# Altium PCB alim.PcbDoc
Units mil, origin at the board's own origin, x right, y up, seen from the top; angles counter-clockwise.
Board outline 4020 x 2755 mil, 2 copper layers (Top Layer, Bottom Layer); 38 components, 28 nets, 124 pads, 38 vias.
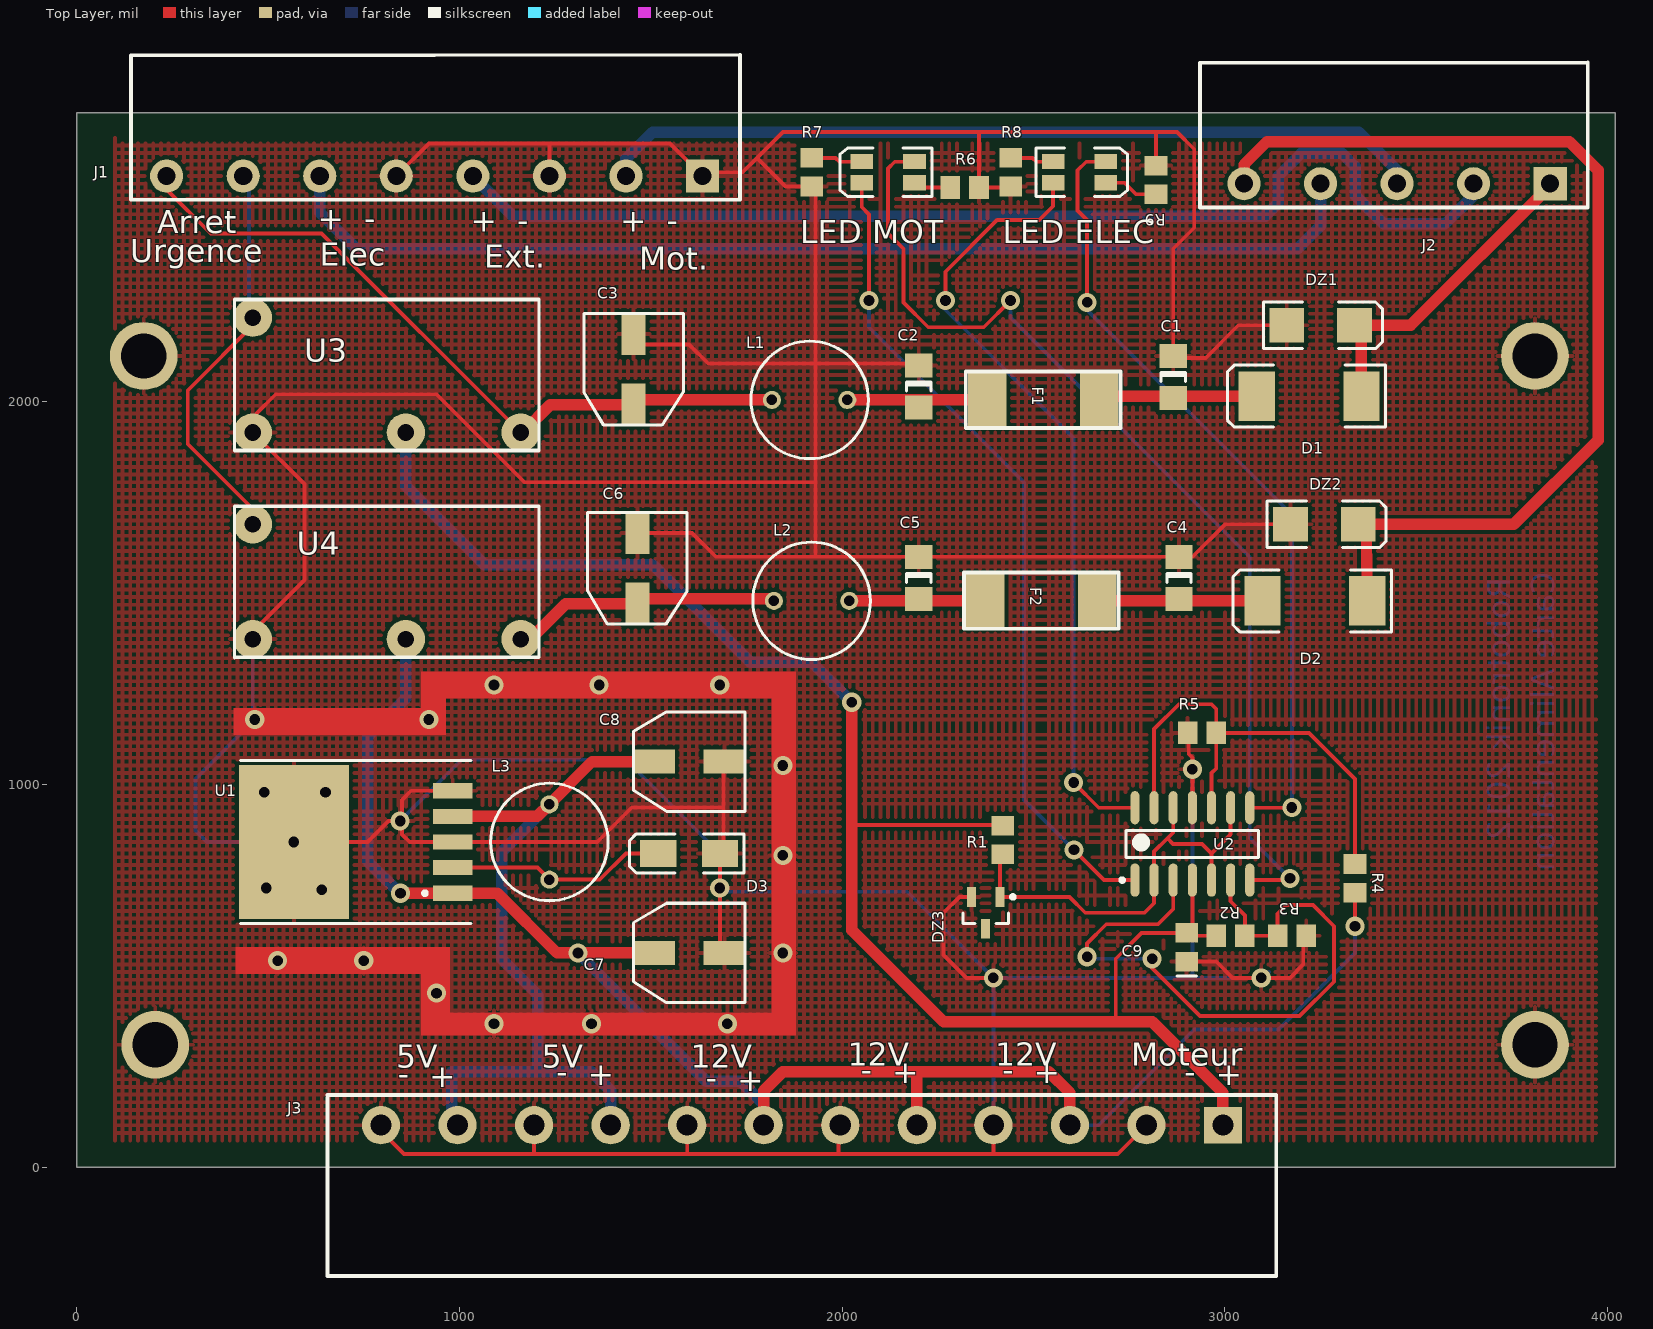
[diagram p0: Top Layer view]
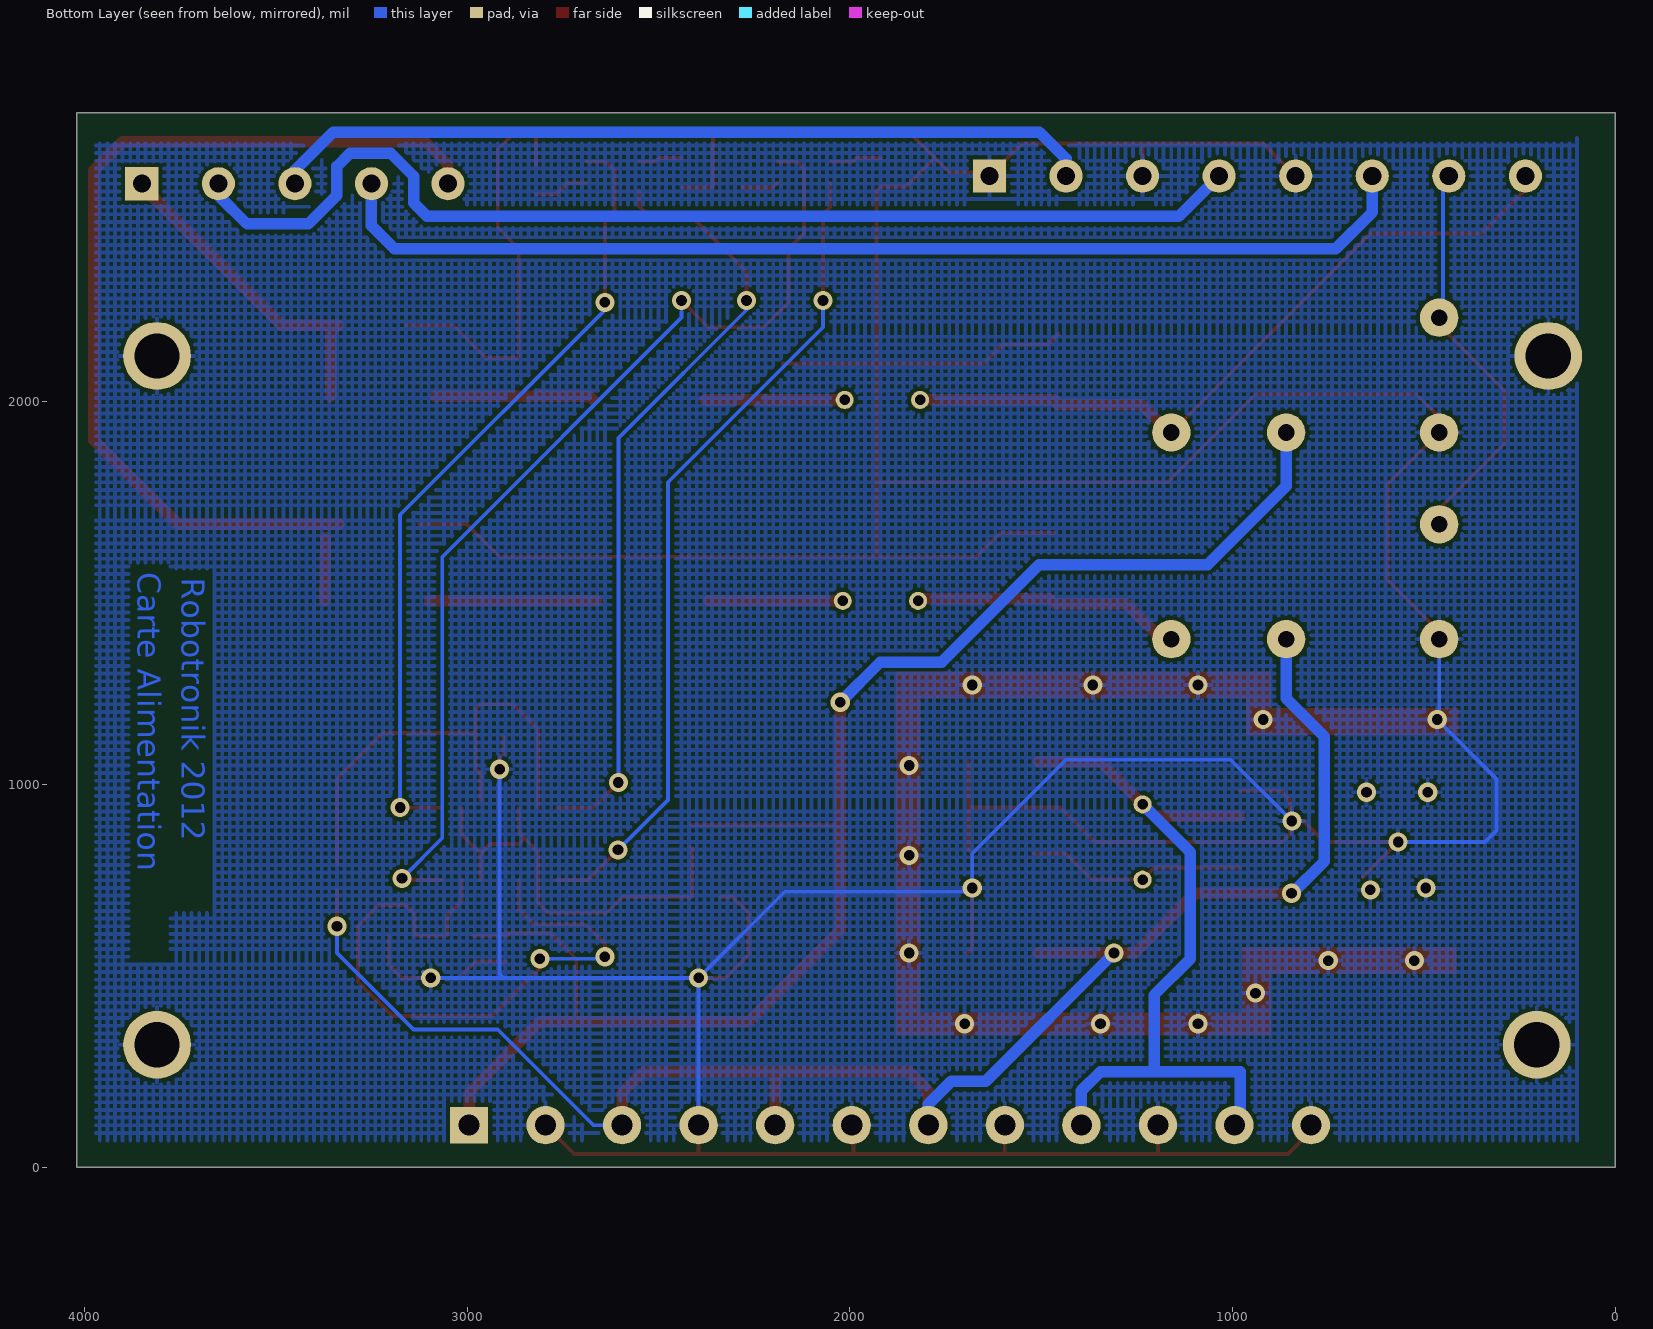
[diagram p1: Bottom Layer view, seen from below]

## Layer stack, top to bottom
Top Layer: signal copper 1.4
Dielectric: core 12.6, FR-4, Dk 4.8
Bottom Layer: signal copper 1.4

## Board outline
0,2755 4020,2755 4020,0 0,0

## Design rules (kind name [scope] priority, off if disabled: settings)
Clearance [All] p1: gap=10
PolygonConnect [All] p1: connectstyle=Relief reliefconductorwidth=10 reliefentries=4 polygonreliefangle="90 Angle"
RoutingVias [All] p1: holewidth=28 width=50 viastyle="Through Hole" minholewidth=28 minwidth=50 maxholewidth=28 maxwidth=50
SilkscreenOverComponentPads [All] p1: minsilkscreentomaskgap=10
SolderMaskExpansion [All] p1: expansion=4
Width [All] p1: maxlimit=30 minlimit=10 preferedwidth=10
27 further rules are at their usual default settings.

## Components (designator, comment, footprint, x,y, rotation, side; value= is the part's Value field where it differs from the comment)
C1 "C1206" 1206 2865,2065 r270 top
C2 "C1206" 1206 2200,2040 r270 top
C3 "220µF/50V" Cap-D6 1455,2085 r270 top
C4 "C1206" 1206 2880,1540 r270 top
C5 "C1206" 1206 2200,1540 r270 top
C6 "220µF/50V" Cap-D6 1465,1565 r270 top
C7 "100µF/50V" Cap-D6 1600,560 r180 top
C8 "330µF/50V" Cap-D6 1600,1060 r180 top
C9 "C0805" 0805 2900,575 r90 top
D1 "Diode" DSO-C2/X3.3 3220,2015 r180 top (schematic designator D4)
D2 "Diode" DSO-C2/X3.3 3235,1480 r180 top (schematic designator D4)
D3 "10MQ040" DSO-C2/X1.8 1600,820 r180 top (schematic designator D5)
DZ1 "SMCJ40CA" DSO-C2/X2.3 3250,2200 r0 top
DZ2 "SMCJ40CA" DSO-C2/X2.3 3260,1680 r0 top (schematic designator DZ1)
DZ3 "Zener 5V" MF03A_N 2375,665 r270 top
F1 "Fuse" "FUSE MF-SM050" 2525,2005 r180 top
F2 "Fuse" "FUSE MF-SM050" 2520,1480 r180 top (schematic designator F1)
J1 "Header 8" EMBMCS8 1635,2590 r180 top
J2 "header1x5" H1x5 2995,3090 r270 top
J3 "Header 12" MCS12 1895,110 r180 top
L1 "100µH" SELF1 1915,2005 r180 top
L2 "100µH" SELF1 1920,1480 r180 top
L3 "330µH" SELF1 1235,850 r90 top
"LED ELEC" "HSMF-C656" 3.2X2.7X1.1A 2620,2600 r0 top (schematic designator LED9)
"LED MOT" "HSMF-C656" 3.2X2.7X1.1A 2120,2600 r180 top (schematic designator LED9)
R1 "ERA6Y" ERA-0805 2420,855 r270 top
R2 "ERA6Y" ERA-0805 3015,605 r0 top
R3 "ERA6Y" ERA-0805 3175,605 r0 top
R4 "ERA6Y" ERA-0805 3340,755 r90 top
R5 "ERA6Y" ERA-0805 2940,1135 r180 top
R6 "ERA6Y" ERA-0805 2320,2560 r0 top
R7 "ERA6Y" ERA-0805 1920,2600 r270 top
R8 "ERA6Y" ERA-0805 2440,2600 r270 top
R9 "ERA6Y" ERA-0805 2820,2580 r90 top
U1 "LM2575D2T-5" 936A-02 775,850 r90 top
U2 "LM2902D" D014_N 2915,845 r90 top
U3 "relay4" "Relay 4" 460,2220 r270 top
U4 "relay4" "Relay 4" 460,1680 r270 top

## Footprints (in the part's own frame and the unit in brackets; to place one, negate y for a bottom-side part, rotate by r counter-clockwise, add the part's x,y. Pads: shape width x height; smd on the part's side, far side on the other; paste and mask are expansions set on the pad)
3.2X2.7X1.1A [mm] "SM LED, Bi-Colour; 4 Flat Leads; Body 3.2 x 2.7 x 1.1 mm (LxWxH)"
  rect 1.5x1 smd: 1(-1.75,0.7) 2(-1.75,-0.7) 3(1.75,0.7) 4(1.75,-0.7)
  silkscreen extent -2.9,-1.6 3.2,1.6
0805 [mm] "Chip Capacitor; Body 2.0 x 1.2 mm (LxW typ)"
  rect 1.3x1.5 smd: 1(-0.95,0) 2(0.95,0)
  silkscreen extent -1.9,-0.65 -1.9,0.65
936A-02 [mm] "D2-PAK; 5 Leads; Body 14.7 (inc. leads) x 10.2 mm (LxW max)"
  rect 1x2.6 smd: 1(-3.4,-5.275) 2(-1.7,-5.275) 3(0,-5.275) 4(1.7,-5.275) 5(3.4,-5.275)
  rect 10.2x7.3 smd: 6(0,5.275)
  silkscreen extent -5.4,-6.48 5.4,8.82
1206 [mm] "Chip Capacitor; Body 3.2 x 1.6 mm (LxW typ)"
  rect 1.6x1.8 smd: 1(-1.4,0) 2(1.4,0)
  silkscreen extent -0.3,-0.8 0.3,0.8
Cap-D6 [mm]
  rect 2.8x1.6 smd: 1(2.35,0) 2(-2.35,0)
  silkscreen extent -3.7,-3.3 3.7,3.3
D014_N [mm] "SOIC, 14-Leads, Body 8.7x3.9mm, Pitch 1.27mm, IPC Medium Density"
  oval 2.2x0.6 smd: 1(-2.4,3.81) 2(-2.4,2.54) 3(-2.4,1.27) 4(-2.4,0) 5(-2.4,-1.27) 6(-2.4,-2.54) 7(-2.4,-3.81) 8(2.4,-3.81) 9(2.4,-2.54) 10(2.4,-1.27) 11(2.4,0) 12(2.4,1.27) 13(2.4,2.54) 14(2.4,3.81)
  silkscreen extent -2.52,-4.4 0.9,4.78, body extent -2,-4.38 2,4.38, height 1.75
DSO-C2/X1.8 [mm] "DO-214-AC/SMA; 2 C-Bend Leads; Body 5 x 2.7 mm, inc. leads (LxW)"
  rect 2.4x1.8 smd: 1(-2.05,0) 2(2.05,0)
  silkscreen extent -3.65,-1.3 3.95,1.3
DSO-C2/X2.3 [mm] "DO-214-AA/SMB; 2 C-Bend Leads; Body 5.3 x 3.6 mm, inc. leads (LxW)"
  rect 2.3x2.3 smd: 1(-2.25,0) 2(2.25,0)
  silkscreen extent -3.8,-1.55 4.1,1.55
DSO-C2/X3.3 [mm] "DO-214-AB/SMC; 2 C-Bend Leads; Body 8 x 5.9 mm, inc. leads (LxW)"
  rect 2.4x3.3 smd: 1(-3.475,0) 2(3.475,0)
  silkscreen extent -5.07,-2.05 5.43,2.05
EMBMCS8 [mm]
  rect 2.2x2.2 hole 1.2: 1(0,0)
  round 2.2 hole 1.2: 2(5.08,0) 3(10.16,0) 4(15.24,0) 5(20.32,0) 6(25.4,0) 7(30.48,0) 8(35.56,0)
  silkscreen extent -2.49,-8.05 37.92,1.57
ERA-0805 [mm] "Chip Resistor; Body 2 x 1.3 mm (LxW typ)"
  rect 1.3x1.5 smd: 1(-0.95,0) 2(0.95,0)
"FUSE MF-SM050" [mil]
  rect 100x140 smd: 1(-146,0) 2(146,0)
  silkscreen extent -202,-74 202,73
H1x5 [mm]
  rect 2.2x2.2 hole 1.2: 1(13.208,21.717)
  round 2.2 hole 1.2: 2(13.208,16.637) 3(13.208,11.557) 4(13.208,6.477) 5(13.208,1.397)
  silkscreen extent 5.16,-1.52 14.78,24.21
MCS12 [mil]
  rect 100x96.06 hole 55.12: 1(-1100,0)
  round 100 hole 55: 2(-900,0) 3(-700,0) 4(-500,0) 5(-300,0) 6(-100,0) 7(100,0) 8(300,0) 9(500,0) 10(700,0) 11(900,0) 12(1100,0)
  silkscreen extent -1239,-79 1240,394
MF03A_N [mm] "SOT23, 3-Leads, Body 2.9x1.3mm, Pitch 0.95mm, Lead Span 2.4mm, IPC Medium Density"
  rect 1.3x0.6 smd: 1(-1.05,0.95) 2(-1.05,-0.95) 3(1.05,0)
  silkscreen extent -1.17,-1.5 0.7,1.93, body extent -0.7,-1.5 0.7,1.5, height 1.12
"Relay 4" [mm]
  round 2.54 hole 1.1: 1(7.62,17.78) 2(7.62,10.16) 3(0,0) 4(7.62,0)
  silkscreen extent -1.2,-1.2 8.86,18.98, body extent -1.27,-1.27 8.76,19.05, height 10.06
SELF1 [mm]
  round 1.2 hole 0.7: 1(-2.5,0) 2(2.5,0)
  silkscreen extent -3.9,-3.9 3.9,3.9

## Part data
C1 C2 C4 C5 C9: "Ceramic Chip Capacitor - Standard"
C3 C6 C7 C8: library part "Cap Pol3", "Polarized Capacitor (Surface Mount)"
D1 D2: "Default Diode"
D3: library part Diode, "Default Diode"
DZ1 DZ2: library part Tranzorb, "Tranzorb"
DZ3: library part LM4040AIM3-5.0, "Precision Micropower Shunt Voltage Reference"
F1 F2: library part "Fuse 1"
J1: "Header, 8-Pin"
J3: "Header, 12-Pin"
L1 L2 L3: library part "Inductor Iron", "Magnetic-Core Inductor"
"LED ELEC" "LED MOT": "SMT Bi-Colour Chip LED (Yellow/Green)"
R1 R2 R3 R4 R5 R6 R7 R8 R9: "Rectangular Thick Film Chip Resistor, 10 Ohm to 1M Ohm Range, 0.1% and 0.5% Tolerance, 0805 Size, 0.1 W"
U1: "Easy Switcher 1.0A Step-Down Voltage Regulator"
U2: "Quadruple Operational Amplifier"

## Free pads (board coordinates)
  round 177.17 hole 118.11: 1(175,2120) 1(205,320) 1(3810,320) 1(3810,2120)

## Via types
v1: diameter 50, hole 28, Top Layer to Bottom Layer, 38 vias

## Nets (pads, with @x,y where several pads share a name; then routed paths per layer and width w, separated by ;. In a path a pad name is that pad's centre, name@x,y a point inside that pad or via, vN(x,y) a via of type N, cw(c..) or ccw(c..) an arc to the next point about the centre after c; other vN are vias at no path point)
"+5V ELEC": C8.1 J3.9 J3.11 L3.2 U1.4 | length 2045.5
  Top Layer w30: U1.4 1203.5,916.93 L3.2 1346.57,1060 C8.1
  Bottom Layer w30: J3.11 980,125 980,250 1205,250 ; L3.2 1110,823.43 1110,545 1205,450 1205,250 ; J3.9 1395,200 1345,250 1205,250
"+12V ELEC": C7.1 J3.3 J3.5 J3.7 R4.1 U1.1 U4.2 | length 4438.9
  Top Layer w10: v1(3340,630) R4.1@3340,725.47
  Top Layer w30: v1@845,715 v1(846.14,716.14) U1.1 1098.86,716.14 1255,560 v1(1310,560) C7.1 ; J3.7 1795,200 1845,250 2540,250 2595,195 J3.3 ; J3.5 2195,245
  Bottom Layer w10: J3.3 2670,110 2920,360 3140,360 3340,560 v1(3340,630) v1@3340,645
  Bottom Layer w30: v1(846.14,716.14) 843.86,716.14 760,800 760,1125 860,1225 U4.2 ; v1(1310,560) 1645,225 1735,225 1795,165 J3.7
"+12V MOT": C9.2 J3.1 R1.1 R2.1 U2.4 U3.2 | length 4365.1
  Top Layer w10: 2025,894.53 R1.1@2415,894.53 ; 2715,380 2715,545 2782.4,612.4 C9.2 ; C9.2@2892.6,605 R2.1@2985.47,605 ; C9.2@2915,620 U2.4
  Top Layer w30: U3.2@855,1905 U3.2@870,1920 ; v1@2025,1202.5 2025,620 2265,380 2715,380 2810,380 2995,195 J3.1
  Bottom Layer w30: U3.2 860,1780 1065,1575 1505,1575 1760,1320 1920,1320 v1(2025,1215)
GND: C1.1 C2.1 C3.2 C4.1 C5.1 C6.2 C7.2 C8.2 C9.1 D3.1 DZ1.1 DZ2.1 DZ3.2 J1.1 J1.3 J1.5 J3.2 J3.4 J3.6 J3.8 J3.10 J3.12 pad.1 R3.2 R5.2 R6.2 R7.2 R8.2 R9.2 U1.3 U1.5 U1.6 U2.11 U3.4 U4.4 | length 19192.9
  Top Layer w10: U4.4@455,1395 595,1535 595,1785 470,1910 470,1970 520,2020 940,2020 1170,1790 1930,1790 ; U1.6@660,757.32 v1(567.32,850) 760,850 815,905 v1(845,905) v1@850,905 ; J3.12@795,95 855,35 1195,35 ; J1.5 920,2675 1235,2675 ; U1.5 873.86,983.86 850,960 v1@850,905 ; J3.10 1195,35 ; J1.3 1235,2675 ; C3.2 1482.52,2150 1600,2150 1650,2100 1930,2100 ; C6.2 1607.48,1657.52 1669.88,1595.12 1930,1595.12 ; J3.8@1595,95 J3.8 1595,35 ; C7.2 1680.71,571.81 D3.1 1690,829.29 1690,940 ; C8.2 1690,1057.48 1690,940 ; J3.6 1990,105 1990,35 ; C2.1@2175,2100.12 1930.12,2100.12 1930,2100 ; DZ3.2 2306.34,706.34 2265,665 2265,555 2325,495 v1(2395,495) ; J3.4 2395,35 ; R8.2@2437.4,2560 R6.2 2357.4,2702.6 2355,2705 ; J3.2 2720,35 2395,35 ; R9.2 2820,2705 ; C9.1 2977.4,537.6 3020,495 v1(3095,495) 3170,495 3204.53,529.53 R3.2@3204.53,605 ; R5.2@2905.47,1125 2905.47,1079.53 2915,1070 v1(2915,1040) U2.11 ; DZ2.1@3126.42,1680 3000,1680 2915.12,1595.12 C4.1 C5.1 1930,1595.12 ; DZ1.1 3035,2200 2950,2115 2870.12,2115 C1.1 2865,2400 2920,2455 2920,2660 2875,2705 2820,2705 ; v1@850,905 850,870 870,850 U1.3 1360,850 1450,940 1690,940 ; 1195,35 1595,35 ; 1235,2675 1550,2675 J1.1 1645,2600 1740,2600 1777.47,2637.47 ; 1595,35 1990,35 ; 1777.47,2637.47 1845,2705 2355,2705 ; 1777.47,2637.47 1852.35,2562.6 R7.2 1930,2552.6 1930,2100 ; 1930,1595.12 1930,1790 ; 1930,1790 1930,2100 ; 1990,35 2395,35 ; 2355,2705 2820,2705
  Bottom Layer w10: v1@460,1170 U4.4 ; v1(465,1170) 310,1015 310,880 340,850 v1(567.32,850) ; v1(845,905) 1005,1065 1435,1065 1680,820 v1(1680,730) ; v1@1680,720 2170,720 v1(2395,495) ; J3.4 v1(2395,495) ; v1@2400,500 v1(2395,495) ; v1(2915,1040) 2915,505 2905,495 ; 3115,510 3100,495 v1(3095,495) 2905,495 ; v1(2395,495) 2905,495
  other v1: 1090,375 1345,375 1700,375 940,455 525,540 750,540 1845,560 640,725 495,730 1845,815 490,980 650,980 1845,1050 920,1170 1090,1260 1365,1260 1680,1260
NetC1_2: C1.2 D1.2 F1.1 | length 416.3
  Top Layer w30: F1.1 2681,2015 D1.2
NetC2_2: C2.2 F1.2 L1.1 | length 359.7
  Top Layer w30: L1.1@2020,2006.57 2021.57,2005 F1.2
NetC3_1: C3.1 J1.8 L1.2 U3.1 | length 1902.7
  Top Layer w10: J1.8 235,2555 350,2440 640,2440 U3.1
  Top Layer w30: U3.1@1170,1925 1237.48,1992.48 C3.1 1467.52,2005 L1.2
NetC4_2: C4.2 D2.2 F2.1 | length 437.2
  Top Layer w30: F2.1@2661,1480 D2.2
NetC5_2: C5.2 F2.2 L2.1 | length 350.6
  Top Layer w30: L2.1 F2.2@2369,1480
NetC6_1: C6.1 L2.2 U4.1 | length 680.1
  Top Layer w30: U4.1@1185,1380 1277.48,1472.48 C6.1 1477.52,1485 L2.2@1821.57,1485
NetD1_1: D1.1 DZ1.2 J2.1 | length 860.2
  Top Layer w30: D1.1 3356.81,2181.77 DZ1.2 3485,2200 3850,2565 J2.1
NetD2_1: D2.1 DZ2.2 J2.5 | length 2632.1
  Top Layer w30: J2.5 3050,2620 3110,2680 3900,2680 3975,2605 3975,1900 3755,1680 DZ2.2@3335,1680 ; DZ2.2@3370,1645 D2.1
NetD3_2: D3.2 L3.1 U1.2 | length 578
  Top Layer w10: U1.2 1203.5,783.07 L3.1 1366.57,751.57 1435,820 D3.2
NetJ1_2: J1.2 J2.3 | length 2165.4
  Bottom Layer w30: J1.2 1435,2635 1505,2705 3350,2705 3450,2605 J2.3
NetJ1_4: J1.4 J2.2 | length 2945.9
  Bottom Layer w30: J1.4 1140,2485 3105,2485 3140,2520 3140,2590 3200,2650 3305,2650 3340,2615 3340,2540 ; 3342.5,2537.5 3415,2465 3575,2465 3650,2540 J2.2
NetJ1_6: J1.6 J2.4 | length 2884.2
  Bottom Layer w30: J1.6 635,2495 730,2400 3190,2400 3250,2460 J2.4
NetJ1_7: J1.7 U3.3 U4.3 | length 1059.5
  Top Layer w10: U4.3@450,1675 450,1730 290,1890 290,2030 U3.3@470,2210
  Bottom Layer w10: J1.7@425,2575 450,2550 450,2230 U3.3@470,2210
"NetLED ELEC_1": "LED ELEC.3" U2.8 | length 2060.4
  Top Layer w10: v1(2640,2260) 2640,2475 2615,2500 2615,2605 2637.56,2627.56 2688.9,2627.56 ; U2.8 3164.49,939.49 v1@3170,945
  Bottom Layer w10: 2645,2235 3175,1705 v1(3175,940)
"NetLED ELEC_2": "LED ELEC.2" U2.14 | length 2063.4
  Top Layer w10: v1@2270,2245 v1(2270,2265) 2270,2340 2405,2475 2515,2475 2551.1,2511.1 2551.1,2552.44 ; v1(2604.8,1005.2) 2670.51,939.49 U2.14
  Bottom Layer w10: v1@2260,2250 2604.8,1905.2 v1(2604.8,1005.2)
"NetLED ELEC_3": "LED ELEC.4" R9.1 | length 143.5
  Top Layer w10: 2688.9,2572.44 2737.56,2572.44 2767.4,2542.6 R9.1
"NetLED ELEC_4": "LED ELEC.1" R8.1 | length 115.2
  Top Layer w10: R8.1 2497.6,2637.4 2507.44,2627.56 2551.1,2627.56
"NetLED MOT_1": "LED MOT.3" U2.1 | length 2172.8
  Top Layer w10: 2051.1,2572.44 2051.1,2508.9 2070,2490 v1(2070,2265) ; v1@2600,835 v1(2605.64,829.36) 2684.49,750.51 U2.1
  Bottom Layer w10: v1(2070,2265) 2070,2195 2475,1790 2475,960 v1(2605.64,829.36)
"NetLED MOT_2": "LED MOT.2" U2.7 | length 2667.9
  Top Layer w10: 2188.9,2627.56 2137.56,2627.56 2120,2610 2120,2440 2160,2400 2160,2260 2225,2195 2370,2195 v1(2440,2265) ; U2.7 3165.51,750.51 v1(3170,755)
  Bottom Layer w10: 2440,2235 2440,2220 3065,1595 3065,860 v1(3170,755)
"NetLED MOT_3": "LED MOT.4" R7.1 | length 135.2
  Top Layer w10: R7.1 1982.6,2637.4 1992.44,2627.56 2051.1,2627.56
"NetLED MOT_4": "LED MOT.1" R6.1 | length 98.9
  Top Layer w10: 2188.9,2572.44 2201.34,2560 R6.1
NetR2_2: R2.2 R3.1 U2.3 U2.6 | length 1729.2
  Top Layer w10: v1(2640,550) 2640,585 2690,635 2825,635 2865,675 U2.3 ; v1@2795,535 2935,395 3195,395 3285,485 3285,630 3230,685 3160,685 3137.6,662.6 R3.1 R2.2@3064.53,605 ; U2.6 3015,695 3052.4,657.6 R2.2
  Bottom Layer w10: v1@2655,545 v1(2810,545)
NetR4_2: R4.2 R5.1 U2.10 U2.13 | length 1277.6
  Top Layer w10: U2.13 2815,1145 2880,1210 2965,1210 2977.4,1197.6 R5.1 ; U2.10@2965,960 2965,1030 2977.4,1042.4 R5.1 ; R4.2 3340,1015 3220,1135 R5.1
VREF: DZ3.1 R1.2 U2.2 U2.5 U2.9 U2.12 | length 1172
  Top Layer w10: R1.2@2415,835.47 2412.4,832.87 DZ3.1 2593.66,706.34 2635,665 2790,665 2815,690 U2.2 2815,825 2849.59,859.59 ; U2.12 2865,875 2849.59,859.59 ; U2.5 2965,820 ; U2.9 3015,870 2965,820 ; 2849.59,859.59 2864.17,845 2940,845 2965,820
pads on no net: DZ3.3

## Polygon pours and split planes (outlines as drawn)
GND on Top Layer "Top Layer-No Net" (hatched 90Degree grid 20 track 10): 100,2685 110,2675 3970,2675 3970,75 3965,70 100,70
GND on Bottom Layer "Top Layer-No Net" (hatched 90Degree grid 20 track 10): 100,2685 110,2675 3970,2675 3970,75 3965,70 100,70

## Other copper
Top Layer:
  rectangle net GND: 415,505 975,575
  rectangle net GND: 900,345 975,575
  rectangle net GND: 920,345 1880,405
  rectangle net GND: 1815,345 1880,1225
  rectangle net GND: 900,1130 965,1295
  rectangle net GND: 900,1225 1880,1295
  rectangle net GND: 410,1130 965,1200
Bottom Layer:
  text "Carte Alimentation" at 3860,1555 h60 r90
  text "Robotronik 2012" at 3745,1540 h60 r90

## Silkscreen, mask and mechanical layers (free items; w line width, h text height)
Top Overlay:
  text "+  -" at 630,2450 h60
  text "+  -" at 1030,2445 h60
  text "+  -" at 1420,2445 h60
  text "Arret" at 210,2440 h60
  text "Urgence" at 140,2365 h60
  text "Elec" at 635,2355 h60
  text "Ext." at 1065,2350 h60
  text "Mot." at 1470,2345 h60
  text "+  -" at 2200,270 h60 r180
  text "+  -" at 2570,270 h60 r180
  text "+  -" at 1405,265 h60 r180
  text "12V" at 2015,265 h60
  text "12V" at 2400,265 h60
  text "Moteur" at 2755,265 h60
  text "+  -" at 3045,265 h60 r180
  text "5V" at 835,260 h60
  text "+  -" at 990,260 h60 r180
  text "5V" at 1215,260 h60
  text "12V" at 1605,260 h60
  text "+  -" at 1795,250 h60 r180
Top Solder:
  rectangle: 415,505 975,575
  rectangle: 900,345 975,575
  rectangle: 900,345 1885,405
  rectangle: 1810,345 1885,1295
  rectangle: 900,1220 1885,1295
  rectangle: 900,1130 965,1295
  rectangle: 410,1130 965,1200
Mechanical 1:
  the board outline again, w10